# EAGLE board Sequencer-Memory-V1.0-3 3 (EAGLE 7.6.0)
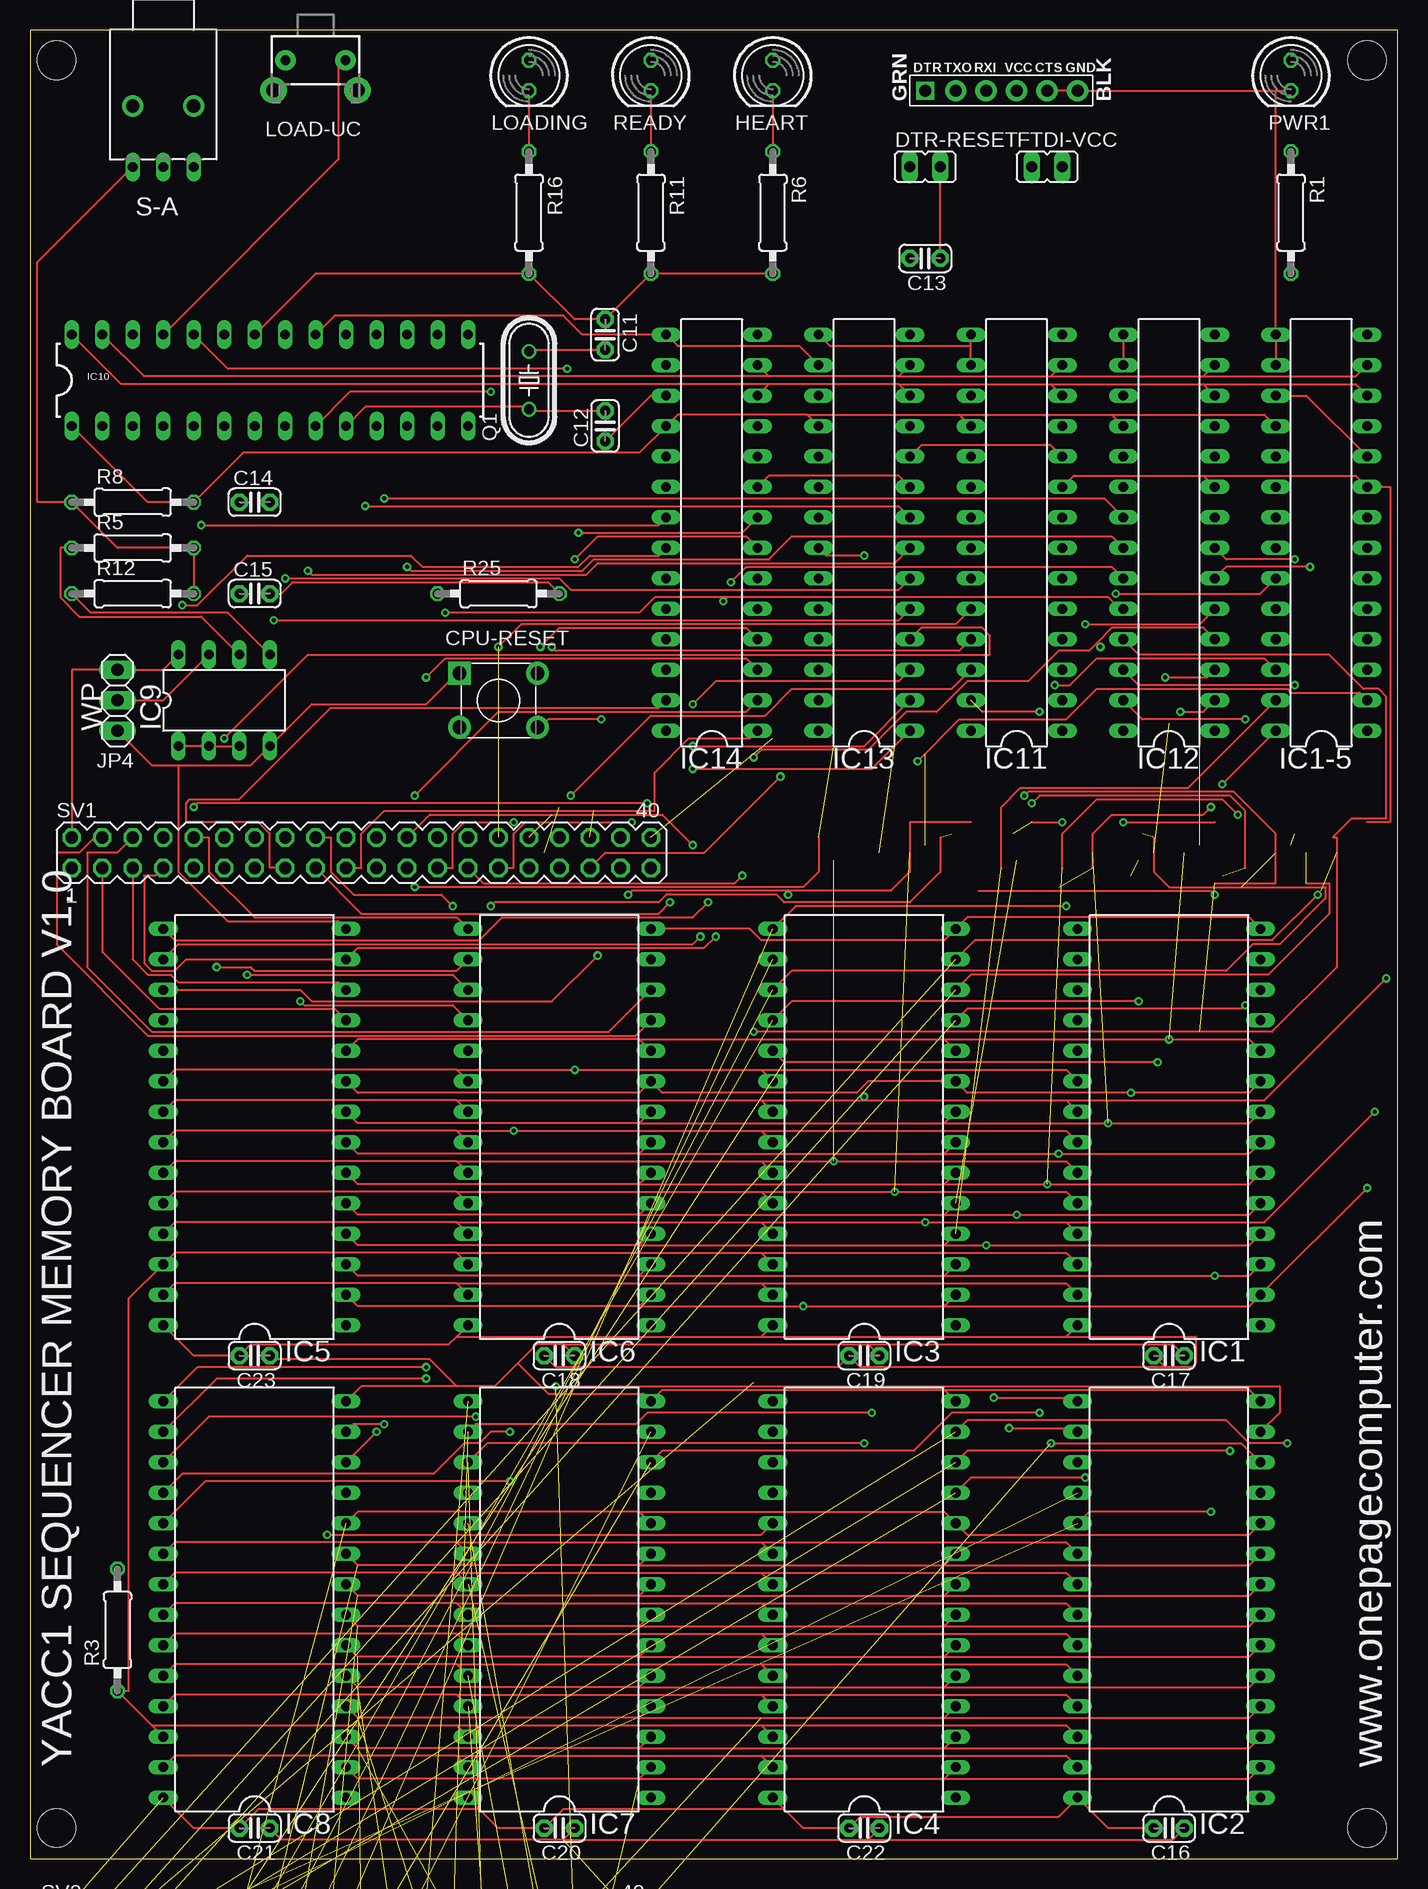
[diagram p0: board, top side]
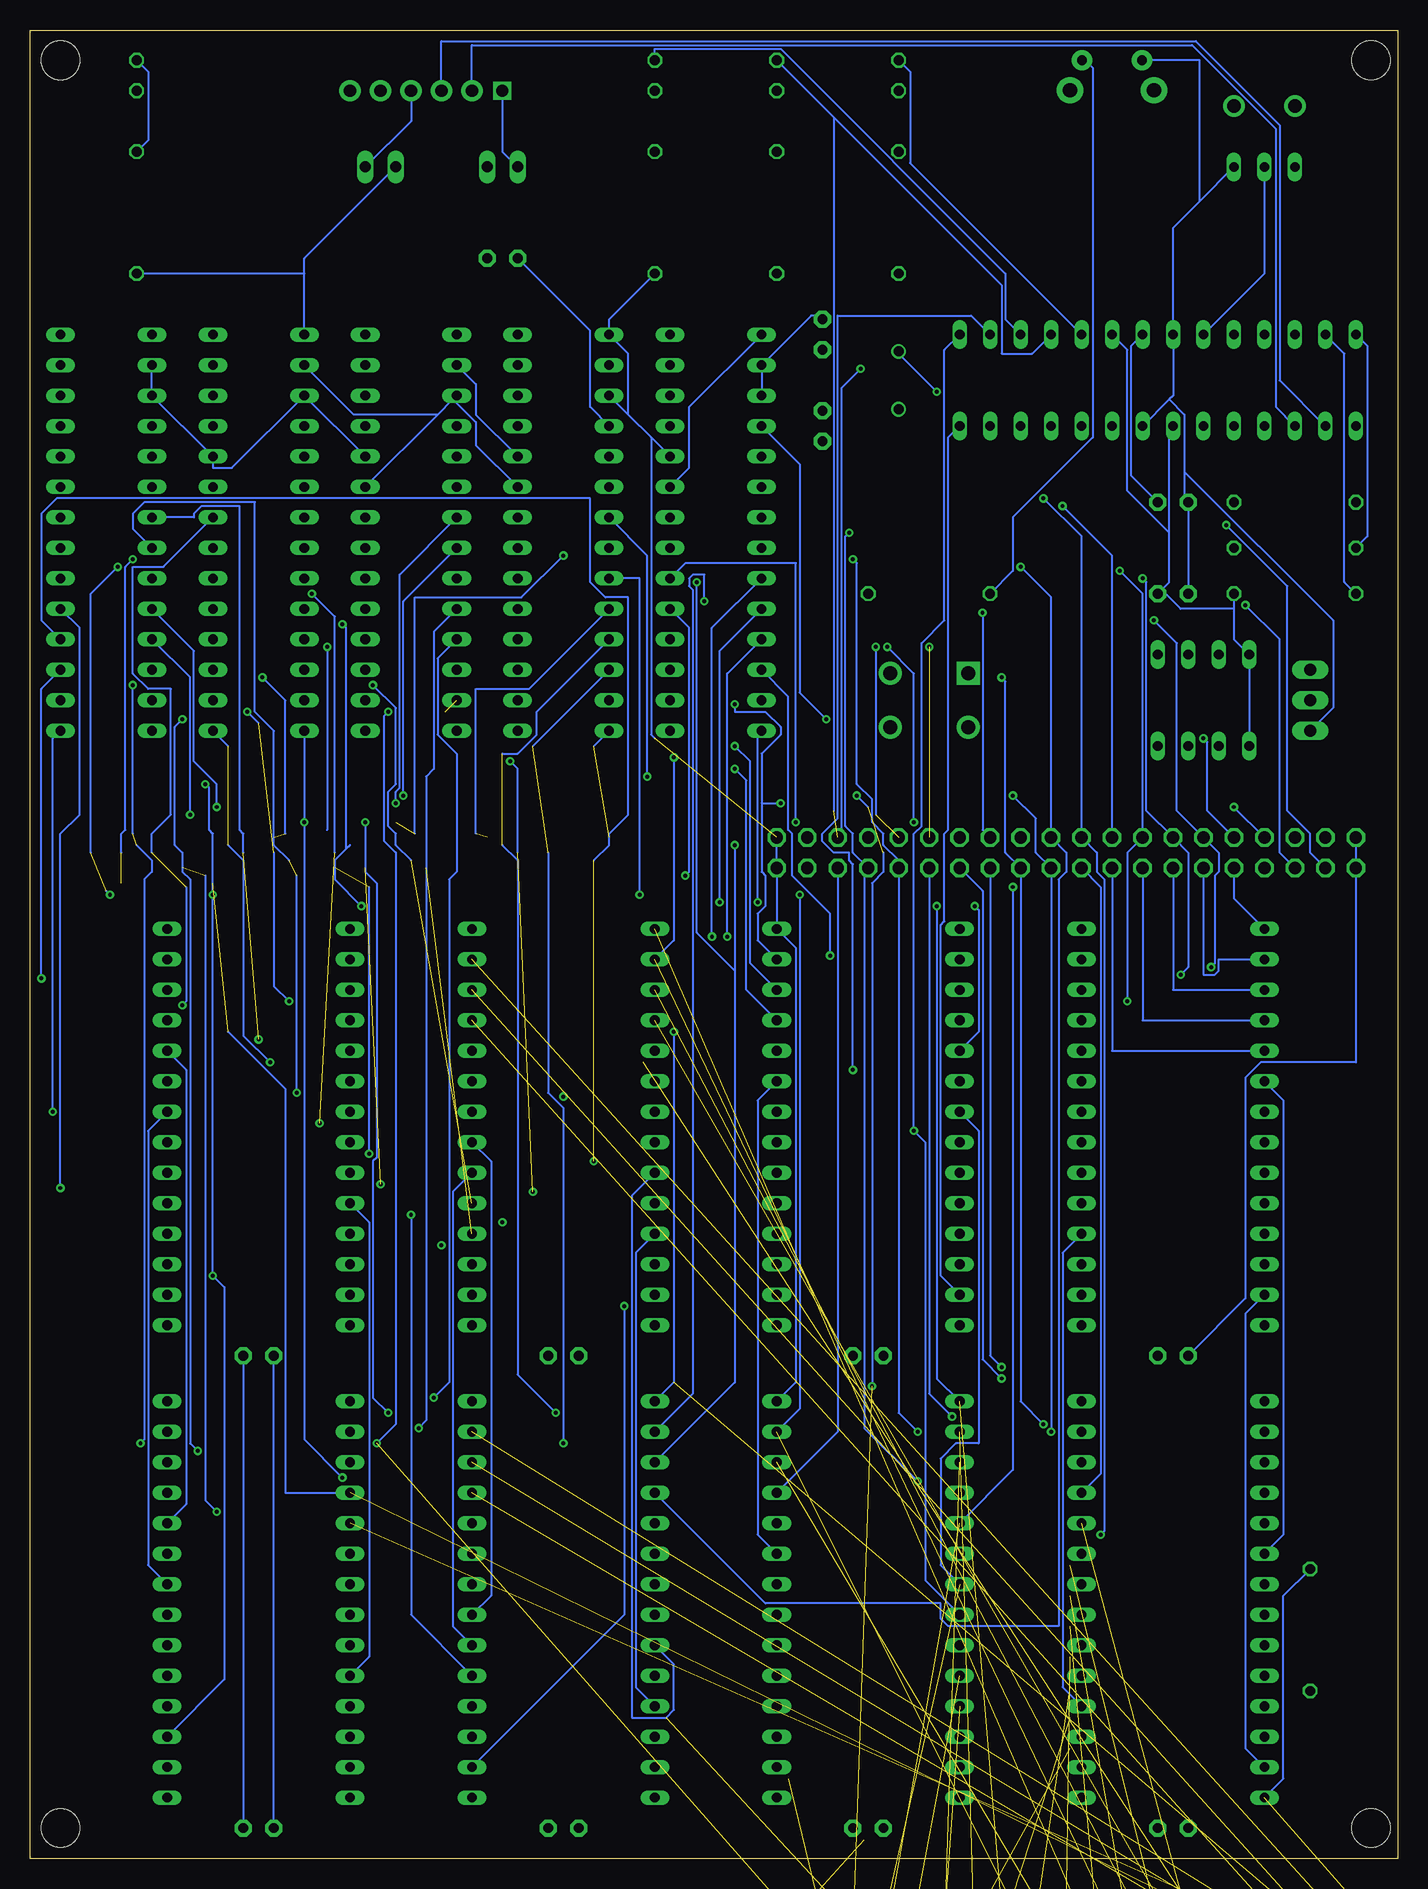
[diagram p1: board, bottom side, seen from below]

Size 113.97 x 152.38 mm. Coordinates in mm from the lower left corner, seen from the top.
Outline: 113.97,0 113.97,152.38 0,152.38 0,0 113.97,0
Copper layers (1*16): Top 0.0356mm / dielectric 1.5011mm / Bottom 0.0356mm
Design rules "LaenPCBOrder *": minimum track width 6mil, minimum drill 13mil, track to track 6mil, track to pad 6mil, pad to pad 6mil, via to via 6mil, smd to smd 6mil, copper to edge 15mil, drill to drill 6mil, minimum pad ring 7mil, minimum via ring 7mil, stop-mask expansion 3mil, vias tented up to drill 0mil, thermal gap 10mil
Holes 3.2 mm at 111.43,2.54 111.43,149.86 2.21,149.86 2.21,2.54

## Footprints (pad centres in the part's own frame; a part is rotated, then mirrored left to right if it is on the bottom)
C025-024X044 = drill 0.813 pad 1.422 octagon: 1 -1.27,0; 2 1.27,0
SW4-6.2X6.2X5.0MM = drill 1.143 pad 1.905 square: 1 -3.25,2.25 | drill 1.143 pad 1.905: 2 -3.25,-2.25; 3 3.25,-2.25; 4 3.25,2.25
JP1 = drill 0.914 long: 1 0,-1.27; 2 0,1.27
LED5MM = drill 0.813 octagon: A -1.27,0; K 1.27,0
DIL28-6 = drill 0.813 long: 1 -16.51,-7.62; 2 -13.97,-7.62; 3 -11.43,-7.62; 4 -8.89,-7.62; 5 -6.35,-7.62; 6 -3.81,-7.62; 7 -1.27,-7.62; 8 1.27,-7.62; 9 3.81,-7.62; 10 6.35,-7.62; 11 8.89,-7.62; 12 11.43,-7.62; 13 13.97,-7.62; 14 16.51,-7.62; 15 16.51,7.62; 16 13.97,7.62; 17 11.43,7.62; 18 8.89,7.62; 19 6.35,7.62; 20 3.81,7.62; 21 1.27,7.62; 22 -1.27,7.62; 23 -3.81,7.62; 24 -6.35,7.62; 25 -8.89,7.62; 26 -11.43,7.62; 27 -13.97,7.62; 28 -16.51,7.62
DIL28-3 = drill 0.813 long: 1 -16.51,-3.81; 2 -13.97,-3.81; 3 -11.43,-3.81; 4 -8.89,-3.81; 5 -6.35,-3.81; 6 -3.81,-3.81; 7 -1.27,-3.81; 8 1.27,-3.81; 9 3.81,-3.81; 10 6.35,-3.81; 11 8.89,-3.81; 12 11.43,-3.81; 13 13.97,-3.81; 14 16.51,-3.81; 15 16.51,3.81; 16 13.97,3.81; 17 11.43,3.81; 18 8.89,3.81; 19 6.35,3.81; 20 3.81,3.81; 21 1.27,3.81; 22 -1.27,3.81; 23 -3.81,3.81; 24 -6.35,3.81; 25 -8.89,3.81; 26 -11.43,3.81; 27 -13.97,3.81; 28 -16.51,3.81
DIL8 = drill 0.813 long: 1 -3.81,-3.81; 2 -1.27,-3.81; 3 1.27,-3.81; 4 3.81,-3.81; 5 3.81,3.81; 6 1.27,3.81; 7 -1.27,3.81; 8 -3.81,3.81
FTDI_DEVICE_SIDE = drill 1 square: P$1 -6.35,0 | drill 1.016 pad 1.778: P$2 -3.81,0; P$3 -1.27,0; P$4 1.27,0; P$5 3.81,0; P$6 6.35,0
1X03 = drill 1.016 long: 1 -2.54,0; 2 0,0; 3 2.54,0
TACTILE-PTH-SIDEEZ = drill 0.8 pad 1.7: 1 -2.5,0; 2 2.5,0 | drill 1.2 pad 2.2: ANCHOR1 -3.5,2.5; ANCHOR2 3.5,2.5
HC49/S = drill 0.813: 1 -2.413,0; 2 2.413,0
0207/10 = drill 0.813 octagon: 1 -5.08,0; 2 5.08,0
9070-1W = drill 0.813 long: 1 5.08,-2.54; 2 5.08,0; 3 5.08,2.54 | drill 1.118 pad 1.778: B 0,-2.54; B1 0,2.54
MA20-2 = drill 1.016 octagon: 1 -24.13,-1.27; 2 -24.13,1.27; 3 -21.59,-1.27; 4 -21.59,1.27; 5 -19.05,-1.27; 6 -19.05,1.27; 7 -16.51,-1.27; 8 -16.51,1.27; 9 -13.97,-1.27; 10 -13.97,1.27; 11 -11.43,-1.27; 12 -11.43,1.27; 13 -8.89,-1.27; 14 -8.89,1.27; 15 -6.35,-1.27; 16 -6.35,1.27; 17 -3.81,-1.27; 18 -3.81,1.27; 19 -1.27,-1.27; 20 -1.27,1.27; 21 1.27,-1.27; 22 1.27,1.27; 23 3.81,-1.27; 24 3.81,1.27; 25 6.35,-1.27; 26 6.35,1.27; 27 8.89,-1.27; 28 8.89,1.27; 29 11.43,-1.27; 30 11.43,1.27; 31 13.97,-1.27; 32 13.97,1.27; 33 16.51,-1.27; 34 16.51,1.27; 35 19.05,-1.27; 36 19.05,1.27; 37 21.59,-1.27; 38 21.59,1.27; 39 24.13,-1.27; 40 24.13,1.27

## Placement (x,y rotation side)
C11  20pf  [C025-024X044]  47.93,127 270 top
C12  20pf  [C025-024X044]  47.93,119.38 90 top
C13  0.1  [C025-024X044]  74.6,133.35 180 top
C14  0.1  [C025-024X044]  18.72,113.03 0 top
C15  0.1  [C025-024X044]  18.72,105.41 0 top
C16  0.1  [C025-024X044]  94.92,2.54 180 top
C17  0.1  [C025-024X044]  94.92,41.91 180 top
C18  0.1  [C025-024X044]  44.12,41.91 180 top
C19  0.1  [C025-024X044]  69.52,41.91 180 top
C20  0.1  [C025-024X044]  44.12,2.54 180 top
C21  0.1  [C025-024X044]  18.72,2.54 180 top
C22  0.1  [C025-024X044]  69.52,2.54 180 top
C23  0.1  [C025-024X044]  18.72,41.91 180 top
CPU-RESET  TS-1109-7  [SW4-6.2X6.2X5.0MM]  39.04,96.52 0 top
DTR-RESET  [JP1]  74.6,140.97 270 top
FTDI-VCC  [JP1]  84.76,140.97 270 top
HEART  [LED5MM]  61.9,148.59 270 top
IC1  [DIL28-6]  94.92,60.96 90 top
IC1-5  MCP23017SP  [DIL28-3]  107.62,110.49 90 top
IC2  [DIL28-6]  94.92,21.59 90 top
IC3  [DIL28-6]  69.52,60.96 90 top
IC4  [DIL28-6]  69.52,21.59 90 top
IC5  [DIL28-6]  18.72,60.96 90 top
IC6  [DIL28-6]  44.12,60.96 90 top
IC7  [DIL28-6]  44.12,21.59 90 top
IC8  [DIL28-6]  18.72,21.59 90 top
IC9  24AA01P  [DIL8]  16.18,96.52 0 top
IC10  ATMEGA328P_PDIP  [DIL28-3]  19.99,123.19 0 top
IC11  MCP23017SP  [DIL28-3]  82.22,110.49 90 top
IC12  MCP23017SP  [DIL28-3]  94.92,110.49 90 top
IC13  MCP23017SP  [DIL28-3]  69.52,110.49 90 top
IC14  MCP23017SP  [DIL28-3]  56.82,110.49 90 top
JP3  FTDI_DEVICE  [FTDI_DEVICE_SIDE]  80.95,147.32 0 top
JP4  [1X03]  7.29,96.52 90 top
LOAD-UC  SWITCH-MOMENTARY-2SIDE_EZ  [TACTILE-PTH-SIDEEZ]  23.8,149.86 180 top
LOADING  [LED5MM]  41.58,148.59 270 top
PWR1  [LED5MM]  105.08,148.59 270 top
Q1  16Mhz  [HC49/S]  41.58,123.19 90 top
R1  330  [0207/10]  105.08,137.16 270 top
R3  10k  [0207/10]  7.29,19.05 90 top
R5  2.2k  [0207/10]  8.56,109.22 0 top
R6  330  [0207/10]  61.9,137.16 270 top
R8  10k  [0207/10]  8.56,113.03 0 top
R11  330  [0207/10]  51.74,137.16 270 top
R12  2.2k  [0207/10]  8.56,105.41 0 top
R16  330  [0207/10]  41.58,137.16 270 top
R25  10k  [0207/10]  39.04,105.41 0 top
READY  [LED5MM]  51.74,148.59 270 top
S-A  [9070-1W]  11.1,146.05 270 top
SV1  [MA20-2]  27.61,83.82 0 top
SV2  [MA20-2]  26.34,-6.35 0 top  (outside the outline)

## Library data of the parts
C11-C23 = adafruit
CPU-RESET = Seeed-OPL-Switch; MPN: TS-1109-7
DTR-RESET FTDI-VCC = jumper
HEART LOADING PWR1 READY = led
IC1-IC8 = memory-hitachi; OC_FARNELL: 283605; OC_NEWARK: unknown
IC1-5 IC11-IC14 = microchip; MF: MICROCHIP; MPN: MCP23017-E/SP; OC_FARNELL: 1332088; OC_NEWARK: 31K2959
IC9 = microchip; MPN: 24AA01-I/P; OC_FARNELL: 1331266; OC_NEWARK: 35M0692
IC10 = SparkFun-DigitalIC
JP3 = SparkFun-Connectors
JP4 = pinhead
LOAD-UC = SparkFun-Electromechanical
Q1 = crystal; OC_FARNELL: 1667008; OC_NEWARK: unknown
R1 = eagle-ltspice; SPICEMODEL: NONE; SPICEPREFIX: R
R3 R5 R6 R8 R11 R12 R16 R25 = resistor
S-A = switch
SV1 SV2 = con-lstb; OC_FARNELL: unknown; OC_NEWARK: unknown

## Nets
-CMEMRD: IC1.22 IC2.22 IC3.22 IC4.22 IC5.22 IC6.22 IC7.22 IC8.22 IC10.15
-CMEMSEL: IC1.20 IC2.20 IC3.20 IC4.20 IC5.20 IC6.20 IC7.20 IC8.20 IC10.16
-CMEMWR: IC1.27 IC2.27 IC3.27 IC4.27 IC5.27 IC6.27 IC7.27 IC8.27 IC10.14
-RESET: C13.2 CPU-RESET.3 IC1-5.18 IC10.1 IC11.18 IC12.18 IC13.18 IC14.18 R8.2
AC-LD: IC3.17 IC12.3 SV2.15
AC-LD-INV: IC3.18 IC12.2 SV2.13
AC-RD: IC3.16 IC12.4 SV2.17
ADDR-REG-ID0: IC5.12 IC14.22 SV1.5
ADDR-REG-ID1: IC5.13 IC14.23 SV1.7
ADDR-REG-LD: IC5.15 IC14.24 SV1.9
ADDR-REG-RD: IC5.16 IC14.25 SV1.11
ALU0: IC4.13 IC12.26 SV2.5
ALU1: IC4.12 IC12.27 SV2.7
ALU2: IC4.11 IC12.28 SV2.9
ALU3: IC3.19 IC12.1 SV2.11
ALU-FUNC: IC4.15 IC12.25 SV2.3
ARD-RXIN: IC10.2 JP3.P$3
ARD-TXOUT: IC10.3 JP3.P$2
BR-COND: IC3.13 IC12.6 SV2.4
CADDR0: IC1-5.21 IC1.10 IC2.10 IC3.10 IC4.10 IC5.10 IC6.10 IC7.10 IC8.10 SV2.14
CADDR1: IC1-5.22 IC1.9 IC2.9 IC3.9 IC4.9 IC5.9 IC6.9 IC7.9 IC8.9 SV2.16
CADDR2: IC1-5.23 IC1.8 IC2.8 IC3.8 IC4.8 IC5.8 IC6.8 IC7.8 IC8.8 SV2.18
CADDR3: IC1-5.24 IC1.7 IC2.7 IC3.7 IC4.7 IC5.7 IC6.7 IC7.7 IC8.7 SV2.20
CADDR4: IC1-5.25 IC1.6 IC2.6 IC3.6 IC4.6 IC5.6 IC6.6 IC7.6 IC8.6 SV2.22
CADDR5: IC1-5.26 IC1.5 IC2.5 IC3.5 IC4.5 IC5.5 IC6.5 IC7.5 IC8.5 SV2.24
CADDR6: IC1-5.27 IC1.4 IC2.4 IC3.4 IC4.4 IC5.4 IC6.4 IC7.4 IC8.4 SV2.26
CADDR7: IC1-5.28 IC1.3 IC2.3 IC3.3 IC4.3 IC5.3 IC6.3 IC7.3 IC8.3 SV2.28
CADDR8: IC1-5.1 IC1.25 IC2.25 IC3.25 IC4.25 IC5.25 IC6.25 IC7.25 IC8.25 SV2.30
CADDR9: IC1-5.2 IC1.24 IC2.24 IC3.24 IC4.24 IC5.24 IC6.24 IC7.24 IC8.24 SV2.32
CADDR10: IC1-5.3 IC1.21 IC2.21 IC3.21 IC4.21 IC5.21 IC6.21 IC7.21 IC8.21 SV2.34
CADDR11: IC1-5.4 IC1.23 IC2.23 IC3.23 IC4.23 IC5.23 IC6.23 IC7.23 IC8.23 SV2.36
CADDR12: IC1-5.5 IC1.2 IC2.2 IC3.2 IC4.2 IC5.2 IC6.2 IC7.2 IC8.2 SV2.38
CMEMSEL: IC1.26 IC2.26 IC3.26 IC4.26 IC5.26 IC6.26 IC7.26 IC8.26 R3.1
GND: C11.1 C12.1 C14.1 C15.1 C16.1 C17.1 C18.1 C19.1 C20.1 C21.1 C22.1 C23.1 CPU-RESET.1 IC1-5.10 IC1-5.15 IC1-5.16 IC1-5.17 IC1.14 IC2.14 IC3.14 IC4.14 IC5.14 IC6.14 IC7.14 IC8.14 IC9.4 IC10.8 IC10.22 IC11.10 IC11.15 IC11.16 IC12.10 IC12.17 IC13.10 IC13.15 IC13.17 IC14.10 IC14.16 IC14.17 JP3.P$5 JP3.P$6 JP4.1 LOAD-UC.2 PWR1.K R6.2 R11.2 R16.2 S-A.3 SV1.39 SV1.40 SV2.39 SV2.40
H/L-SWAP: IC3.12 IC12.7 SV2.6
HEART: HEART.A IC10.17
I/D-REG-DN: IC6.13 IC13.3 SV1.8
I/D-REG-LD: IC6.11 IC13.1 SV1.4
I/D-REG-RD: IC6.12 IC13.2 SV1.6
I/D-REG-UP: IC6.15 IC13.4 SV1.10
I/O-ADDR: IC7.17 IC13.26 SV2.29
I/O-RD: IC7.16 IC13.25 SV2.27
I/O-WR: IC7.15 IC13.24 SV2.25
INT-EN: IC2.15 IC11.25 SV1.32
INT-START: IC2.16 IC11.24 SV1.30
INTA: IC7.19 IC13.28 SV2.33
LD: IC10.19 LOADING.A
LD-INS-REG: IC2.13 IC11.26 SV2.35
MEM-RD: IC7.13 IC13.23 SV2.23
MEM-WR: IC7.12 IC13.22 SV2.21
N$1: PWR1.A R1.1
N$6: C11.2 IC10.9 Q1.2
N$7: C12.2 IC10.10 Q1.1
N$8: C13.1 DTR-RESET.2
N$17: C14.2 IC10.21
N$25: R11.1 READY.K
N$26: LOADING.K R16.1
N$27: HEART.K R6.1
N$30: IC10.23 S-A.2
N$32: IC9.7 JP4.2
N$33: DTR-RESET.1 JP3.P$1
N$34: FTDI-VCC.2 JP3.P$4
N$39: IC10.25 LOAD-UC.1 R25.1
OUT-OFF: IC2.19 IC11.21 SV2.10
OUT-ON: IC3.11 IC12.8 SV2.8
READY: IC10.18 READY.A SV1.36
READY1: IC10.24
REG-BRD-LD-ID0: IC8.12 IC14.2 SV1.21
REG-BRD-LD-ID1: IC8.13 IC14.3 SV1.23
REG-BRD-RD-ID0: IC5.17 IC14.26 SV1.13
REG-BRD-RD-ID1: IC5.18 IC14.27 SV1.15
REG-FUNC: IC5.11 IC14.21 SV1.3
REG-LD-HI: IC7.11 IC13.21 SV1.35
REG-LD-ID0: IC8.15 IC14.4 SV1.25
REG-LD-ID1: IC8.16 IC14.5 SV1.27
REG-LD-LO: IC8.18 IC14.7 SV1.31
REG-RD-HI: IC8.19 IC14.8 SV1.33
REG-RD-ID0: IC5.19 IC14.28 SV1.17
REG-RD-ID1: IC8.11 IC14.1 SV1.19
REG-RD-LO: IC8.17 IC14.6 SV1.29
RESET: IC2.18 IC11.22 SV2.12
SCL: IC1-5.12 IC9.6 IC10.28 IC11.12 IC12.12 IC13.12 IC14.12 R5.1
SDA: IC1-5.13 IC9.5 IC10.27 IC11.13 IC12.13 IC13.13 IC14.13 R12.1
SP/PC-ADDR-RD: IC6.19 IC13.8 SV1.18
SP/PC-DATA-RD-HI: IC6.18 IC13.7 SV1.16
SP/PC-DATA-RD-LO: IC6.17 IC13.6 SV1.14
SP/PC-DN: IC4.17 IC12.23 SV1.24
SP/PC-LD-HI: IC4.18 IC12.22 SV1.22
SP/PC-LD-LO: IC4.19 IC12.21 SV1.20
SP/PC-SEL: IC6.16 IC13.5 SV1.12
SP/PC-UP: IC4.16 IC12.24 SV1.26
SR-LD: IC3.15 IC12.5 SV2.19
UCODE-COUNT-RESET: IC2.12 IC11.27 SV2.37
VCC: C15.2 C16.2 C17.2 C18.2 C19.2 C20.2 C21.2 C22.2 C23.2 FTDI-VCC.1 IC1-5.9 IC1.28 IC2.28 IC3.28 IC4.28 IC5.28 IC6.28 IC7.28 IC8.28 IC9.1 IC9.2 IC9.3 IC9.8 IC10.7 IC10.20 IC11.9 IC11.17 IC12.9 IC12.15 IC12.16 IC13.9 IC13.16 IC14.9 IC14.15 JP4.3 R1.2 R3.2 R5.2 R8.1 R12.2 R25.2 S-A.1 SV1.1 SV1.2 SV2.1 SV2.2

## Tracks (layer width: path | path; a pad name or v marks a point on that pad's centre or on a via)
-CMEMRD  (via drill 0.33)
  Top 0.152: IC8.22 12.05,21.27 35.55,21.27 | IC7.22 35.55,21.27 | 60.95,21.27 IC4.22 | 35.55,21.27 60.95,21.27 | IC2.22 86.35,21.27 60.95,21.27 | IC5.22 12.05,60.64 35.55,60.64 | IC6.22 35.55,60.64 | 60.95,60.64 IC3.22 | 35.55,60.64 v40.31,60.64 60.95,60.64 | IC1.22 86.35,60.64 60.95,60.64
  Bottom 0.152: IC10.15 37.77,125.73 37.77,103.19 39.68,101.28 39.68,86.04 40.31,85.41 v40.31,60.64 39.36,59.69 39.36,23.18 IC7.22
-CMEMSEL  (via drill 0.33)
  Top 0.152: IC8.20 12.05,26.35 35.55,26.35 | IC7.20 35.55,26.35 | 60.95,26.35 IC4.20 | 35.55,26.35 60.95,26.35 | IC2.20 86.35,26.35 60.95,26.35 | IC5.20 12.05,65.72 35.55,65.72 | IC6.20 35.55,65.72 | 60.95,65.72 IC3.20 | 35.55,65.72 v45.39,65.72 60.95,65.72 | IC1.20 86.35,65.72 60.95,65.72
  Bottom 0.152: IC10.16 35.55,128.59 46.66,128.59 46.66,86.68 47.93,85.41 47.93,84.77 46.98,83.82 45.71,83.82 45.71,83.19 45.39,82.87 v45.39,65.72 | IC8.20 9.51,26.99 9.51,63.18 IC5.20
-CMEMWR
  Top 0.152: IC8.27 12.05,8.57 35.55,8.57 | IC7.27 35.55,8.57 | 60.95,8.57 IC4.27 | 35.55,8.57 60.95,8.57 | IC2.27 86.35,8.57 60.95,8.57 | IC5.27 12.05,47.94 35.55,47.94 | IC6.27 35.55,47.94 | 60.95,47.94 IC3.27 | 35.55,47.94 60.95,47.94 | IC1.27 86.35,47.94 60.95,47.94
  Bottom 0.152: IC10.14 37.45,118.43 37.45,85.72 37.77,85.41 37.77,78.11 38.09,77.79 38.09,48.58 IC6.27 | IC8.27 12.69,9.21 12.69,45.4 IC5.27
-RESET  (via drill 0.33)
  Top 0.152: IC10.1 9.83,113.03 R8.2 17.77,117.16 50.79,117.16 IC14.18 53.96,120.33 64.76,120.33 | IC13.18 64.76,120.33 | 77.46,120.33 IC11.18 | 64.76,120.33 77.46,120.33 | 90.16,120.33 IC12.18 | 77.46,120.33 90.16,120.33 | IC1-5.18 102.86,120.33 90.16,120.33 | v47.61,94.93 43.17,94.93 42.53,94.3 CPU-RESET.3
  Bottom 0.152: C13.2 67.3,127.32 67.3,120.97 IC13.18 | v47.61,94.93 49.84,97.16 49.84,116.2 IC14.18
AC-LD  (via drill 0.33)  (2 unrouted)
  Top 0.152: IC3.17 63.49,73.98 99.68,73.98 101.91,76.2 104.13,76.2 107.94,80.01 107.94,80.96 94.92,80.96 93.65,82.23 93.65,85.09 | IC12.3 98.09,98.42 v94.6,98.42
  Bottom 0.152: v94.6,98.42 92.7,96.52 92.7,85.41
AC-LD-INV  (via drill 0.33)  (2 unrouted)
  Top 0.152: IC3.18 63.49,71.44 v92.38,71.44 | IC12.2 97.78,95.57 v95.87,95.57
  Bottom 0.152: v92.38,71.44 93.65,72.71 93.65,83.82 | 94.92,94.61 v95.87,95.57
AC-RD  (via drill 0.33)  (1 unrouted)
  Top 0.152: v60.31,91.76 60.95,92.39 69.84,92.39 73.01,95.57 75.55,95.57 78.09,98.11 83.17,98.11 85.71,100.65 88.25,100.65 88.89,101.28 | 88.89,101.28 90.16,102.55 97.78,102.55 IC12.4 | 88.89,101.28 v89.2,100.97
  Bottom 0.152: IC3.16 60.31,76.52 v60.31,91.76 | v89.2,100.97 89.2,85.72
ADDR-REG-ID0  (via drill 0.33)
  Top 0.152: IC5.12 25.71,73.03 12.37,73.03 11.73,73.66 9.83,73.66 8.56,74.93 SV1.5 | IC14.22 52.38,108.58 46.66,108.58 45.71,107.63 32.69,107.63 31.74,108.58 18.09,108.58 13.96,104.46 v12.69,104.46
  Bottom 0.152: v12.69,104.46 9.83,101.6 9.83,83.82 SV1.5
ADDR-REG-ID1  (via drill 0.33)
  Top 0.152: SV1.7 10.46,81.92 9.51,81.92 9.51,74.61 10.15,73.98 12.05,73.98 13.01,74.93 IC5.13 27.29,75.88 56.19,75.88 v57.14,76.83
  Bottom 0.152: IC14.23 57.14,102.55 v57.14,76.83
ADDR-REG-LD  (via drill 0.33)
  Top 0.152: v56.5,79.69 55.23,78.42 39.36,78.42 37.45,76.52 12.05,76.52 IC5.15
  Bottom 0.152: IC5.15 13.64,80.01 SV1.9 | IC14.24 56.5,100.65 v56.5,79.69
ADDR-REG-RD  (via drill 0.33)
  Top 0.152: v55.87,76.83 55.23,76.2 12.37,76.2 IC5.16
  Bottom 0.152: IC5.16 14.91,74.93 14.91,73.98 15.23,73.66 16.18,73.66 SV1.11 | IC14.25 55.87,98.74 v55.87,76.83
ALU0  (via drill 0.33)  (2 unrouted)
  Top 0.152: IC4.13 78.09,36.51 99.68,36.51 101.59,34.61 v104.76,34.61 | IC12.26 92.38,97.79 v105.4,97.79
  Bottom 0.152: v104.76,34.61 104.45,34.92 104.45,81.6 103.81,82.23 103.81,83.19 105.08,84.45 | 105.4,85.41 v105.4,97.79
ALU1  (via drill 0.33)  (1 unrouted)
  Top 0.152: IC4.12 78.09,33.97 v100,33.97 | IC12.27 92.7,94.93 v101.27,94.93
  Bottom 0.152: v100,33.97 100.64,34.61 100.64,81.6 101.27,82.23 101.27,83.82 101.91,84.45 101.91,94.3 v101.27,94.93
ALU2  (via drill 0.33)  (1 unrouted)
  Top 0.152: IC4.11 78.41,31.75 v87.94,31.75 | v91.11,86.36 98.73,86.36
  Bottom 0.152: v87.94,31.75 91.11,34.92 v91.11,86.36 IC12.28
ALU3  (via drill 0.33)  (2 unrouted)
  Top 0.152: IC3.19 62.85,66.36 v93.97,66.36
  Bottom 0.152: v93.97,66.36 96.19,68.58 96.19,83.19 97.46,84.45 | 97.46,92.71 IC12.1
ALU-FUNC  (via drill 0.33)  (1 unrouted)
  Top 0.152: v60.31,68.9 103.49,68.9 108.89,74.3 108.89,85.09 108.57,85.09 110.16,86.68 113.02,86.68 113.02,96.84 112.38,97.47 111.11,97.47 108.25,100.33 92.38,100.33 IC12.25
  Bottom 0.152: IC4.15 60.31,39.69 v60.31,68.9
ARD-RXIN
  Bottom 0.152: IC10.2 9.83,123.19 9.83,144.46 16.82,151.45 79.68,151.45 JP3.P$3
ARD-TXOUT
  Bottom 0.152: IC10.3 10.15,120.97 10.15,144.15 17.13,151.13 77.14,151.13 JP3.P$2
BR-COND  (via drill 0.33)  (2 unrouted)
  Top 0.152: IC3.13 78.73,76.52 103.49,76.52 v107.3,80.33 | IC12.6 99.68,107.63 v106.67,107.63
  Bottom 0.152: 107.62,80.64 v107.3,80.33 | v106.67,107.63 108.89,105.41 108.89,83.82
CADDR0  (via drill 0.33)  (2 unrouted)
  Top 0.152: IC8.10 27.29,28.89 50.79,28.89 | IC7.10 50.79,28.89 | 50.79,28.89 76.19,28.89 IC4.10 78.09,26.99 101.59,26.99 IC2.10 | IC5.10 27.29,68.26 50.79,68.26 | IC6.10 50.79,68.26 | 76.19,68.26 IC3.10 | 50.79,68.26 76.19,68.26 | IC1.10 101.59,68.26 v94.92,68.26 76.19,68.26
  Bottom 0.152: IC1-5.21 100.32,111.76 100.32,112.08 99.68,112.71 96.51,112.71 96.51,85.72 96.19,85.41 96.19,83.82 | IC2.10 100.95,29.53 100.95,65.72 IC1.10
CADDR1  (via drill 0.33)  (2 unrouted)
  Top 0.152: IC8.9 27.29,24.45 50.79,24.45 | IC7.9 50.79,24.45 | 76.19,24.45 IC4.9 | 50.79,24.45 76.19,24.45 | IC2.9 101.59,24.45 76.19,24.45 | IC5.9 27.29,63.82 50.79,63.82 IC6.9 52.69,63.82 68.89,63.82 69.84,64.77 IC3.9 78.09,63.82 v91.75,63.82 101.59,63.82 IC1.9
  Bottom 0.152: IC1-5.22 105.4,110.81 105.4,112.08 104.45,113.03 95.24,113.03 95.24,95.57 93.65,93.98 93.65,84.45 92.38,83.19 | v91.75,63.82 91.75,81.92 | IC7.9 53.33,26.99 53.33,63.18 IC6.9
CADDR2  (via drill 0.33)  (2 unrouted)
  Top 0.152: IC8.8 27.29,21.91 50.79,21.91 | IC7.8 50.79,21.91 | 76.19,21.91 IC4.8 | 50.79,21.91 76.19,21.91 | IC2.8 101.59,21.91 76.19,21.91 | IC1-5.23 102.54,105.41 v90.48,105.41 | IC5.8 27.29,61.28 50.79,61.28 | IC6.8 50.79,61.28 | 76.19,61.28 IC3.8 | 50.79,61.28 76.19,61.28 | IC1.8 101.59,61.28 v89.84,61.28 76.19,61.28
  Bottom 0.152: v90.48,105.41 88.57,103.5 88.57,83.82 | IC2.8 104.13,24.45 104.13,60.64 IC1.8
CADDR3  (via drill 0.33)  (2 unrouted)
  Top 0.152: IC8.7 27.29,19.37 50.79,19.37 | IC7.7 50.79,19.37 | 76.19,19.37 IC4.7 | 50.79,19.37 76.19,19.37 | IC2.7 101.59,19.37 76.19,19.37 | v98.41,87.63 97.78,87 90.16,87 88.57,85.41 88.57,82.55 | IC5.7 27.29,58.74 50.79,58.74 | IC6.7 50.79,58.74 | 76.19,58.74 IC3.7 | 50.79,58.74 76.19,58.74 | IC1.7 101.59,58.74 v85.71,58.74 76.19,58.74
  Bottom 0.152: IC1-5.24 100.32,100.65 100.32,91.44 98.41,89.53 v98.41,87.63 | v85.71,58.74 85.71,80.96 | IC4.7 75.55,21.91 75.55,58.1 IC3.7
CADDR4  (via drill 0.33)  (2 unrouted)
  Top 0.152: IC8.6 27.29,16.83 50.79,16.83 | IC7.6 50.79,16.83 | 76.19,16.83 IC4.6 | 50.79,16.83 76.19,16.83 | IC2.6 101.59,16.83 76.19,16.83 | v100.64,87 99.36,88.27 88.89,88.27 86.03,85.41 86.03,82.55 | IC5.6 27.29,56.2 50.79,56.2 | IC6.6 50.79,56.2 | 76.19,56.2 IC3.6 | 50.79,56.2 76.19,56.2 | IC1.6 101.59,56.2 v84.76,56.2 76.19,56.2
  Bottom 0.152: IC1-5.25 100.64,98.42 v100.64,87 | IC4.6 78.73,19.37 78.73,55.56 IC3.6
CADDR5  (via drill 0.33)  (2 unrouted)
  Top 0.152: IC8.5 27.29,14.29 50.79,14.29 | IC7.5 50.79,14.29 | 76.19,14.29 IC4.5 | 50.79,14.29 76.19,14.29 | IC2.5 101.59,14.29 76.19,14.29 | IC1-5.26 102.86,100.01 88.89,100.01 86.67,97.79 v85.39,97.79 | IC5.5 27.29,53.66 50.79,53.66 | IC6.5 50.79,53.66 | 76.19,53.66 IC3.5 | 50.79,53.66 76.19,53.66 | IC1.5 101.59,53.66 v82.22,53.66 76.19,53.66
  Bottom 0.152: v85.39,97.79 83.49,95.89 83.49,89.53 84.12,88.9 84.12,86.04 83.49,85.41 83.49,84.45 82.22,83.19 | IC4.5 82.22,20.32 v82.22,53.66
CADDR6  (via drill 0.33)  (2 unrouted)
  Top 0.152: IC8.4 27.29,11.75 50.79,11.75 | IC7.4 50.79,11.75 | 76.19,11.75 IC4.4 | 50.79,11.75 76.19,11.75 | IC2.4 101.59,11.75 76.19,11.75 | IC1-5.27 96.51,89.22 82.54,89.22 80.95,87.63 80.95,82.55 | IC5.4 27.29,51.12 50.79,51.12 | IC6.4 50.79,51.12 | 76.19,51.12 IC3.4 | 50.79,51.12 76.19,51.12 | IC1.4 101.59,51.12 v79.68,51.12 76.19,51.12
  Bottom 0.152: IC8.4 27.93,14.29 27.93,50.48 IC5.4
CADDR7  (via drill 0.33)  (1 unrouted)
  Top 0.152: IC8.3 27.29,9.21 50.79,9.21 | IC7.3 50.79,9.21 | 76.19,9.21 IC4.3 | 50.79,9.21 76.19,9.21 | IC2.3 101.59,9.21 76.19,9.21 | v99.36,89.53 IC1-5.28 | v98.73,80.33 98.41,80.64 79.05,80.64 | IC5.3 27.29,48.58 50.79,48.58 | IC6.3 50.79,48.58 | 76.19,48.58 IC3.3 | 50.79,48.58 76.19,48.58 | IC1.3 101.59,48.58 v98.73,48.58 76.19,48.58
  Bottom 0.152: v99.36,89.53 99.05,89.22 99.05,85.72 98.73,85.41 v98.73,80.33 v98.73,48.58 97.78,47.62 97.78,14.92 IC2.3
CADDR8  (via drill 0.33)  (1 unrouted)
  Top 0.152: IC8.25 12.05,13.65 35.55,13.65 | IC7.25 35.55,13.65 | 60.95,13.65 IC4.25 | 35.55,13.65 60.95,13.65 | IC2.25 86.35,13.65 60.95,13.65 | IC5.25 12.05,53.02 35.55,53.02 | IC6.25 35.55,53.02 | 60.95,53.02 IC3.25 | 35.55,53.02 60.95,53.02 | 86.35,53.02 IC1.25 | 60.95,53.02 v74.6,53.02 86.35,53.02 | v112.06,62.23 102.86,53.02 86.35,53.02
  Bottom 0.152: IC1-5.1 112.06,93.34 v112.06,62.23 | IC4.25 63.49,14.29 63.49,50.48 IC3.25
CADDR9  (via drill 0.33)  (2 unrouted)
  Top 0.152: IC8.24 12.05,16.19 35.55,16.19 | IC7.24 35.55,16.19 | 60.95,16.19 IC4.24 | 35.55,16.19 60.95,16.19 | IC2.24 86.35,16.19 60.95,16.19 | IC1-5.2 110.8,97.16 105.08,97.16 104.76,97.47 88.89,97.47 86.35,94.93 77.46,94.93 v73.97,91.44 | IC5.24 12.05,55.56 35.55,55.56 | IC6.24 35.55,55.56 | 60.95,55.56 IC3.24 | 35.55,55.56 60.95,55.56 | IC1.24 86.35,55.56 v72.06,55.56 60.95,55.56
  Bottom 0.152: v73.97,91.44 73.33,90.81 73.33,83.82 | IC2.24 85.71,16.83 85.71,53.02 IC1.24
CADDR10  (via drill 0.33)  (1 unrouted)
  Top 0.152: IC8.21 12.05,23.81 35.55,23.81 | IC7.21 35.55,23.81 | 60.95,23.81 IC4.21 | 35.55,23.81 60.95,23.81 | IC2.21 86.35,23.81 60.95,23.81 | IC5.21 12.05,63.18 35.55,63.18 | IC6.21 35.55,63.18 | 60.95,63.18 IC3.21 | 35.55,63.18 60.95,63.18 | 86.35,63.18 IC1.21 | 60.95,63.18 69.52,63.18 | 69.52,63.18 86.35,63.18 | v113.02,73.34 102.86,63.18 86.35,63.18 | 69.52,63.18 v69.52,63.5
  Bottom 0.152: IC1-5.3 113.02,97.47 v113.02,73.34 | IC7.21 38.09,24.45 38.09,33.34 36.82,34.61 34.91,34.61 34.91,60.64 IC6.21
CADDR11  (via drill 0.33)  (2 unrouted)
  Top 0.152: IC8.23 12.05,18.73 35.55,18.73 | IC7.23 35.55,18.73 | 60.95,18.73 IC4.23 | 35.55,18.73 60.95,18.73 | IC2.23 86.35,18.73 60.95,18.73 | IC5.23 12.05,58.1 35.55,58.1 | IC6.23 35.55,58.1 | 60.95,58.1 IC3.23 | 35.55,58.1 60.95,58.1 | IC1.23 86.35,58.1 v66.98,58.1 60.95,58.1
  Bottom 0.152: IC1-5.4 113.02,103.19 113.02,112.08 111.75,113.35 67.3,113.35 67.3,106.36 66.03,105.09 64.12,105.09 64.12,87 65.71,85.41 65.71,84.45 66.98,83.19 | IC4.23 60.31,16.19 60.31,12.38 60.95,11.75 63.81,11.75 63.81,55.24 IC3.23
CADDR12  (via drill 0.33)  (1 unrouted)
  Top 0.152: IC8.2 27.29,6.67 50.79,6.67 | IC7.2 50.79,6.67 | 76.19,6.67 IC4.2 | 50.79,6.67 76.19,6.67 | IC2.2 101.59,6.67 76.19,6.67 | IC5.2 27.29,46.04 50.79,46.04 | IC6.2 50.79,46.04 | 76.19,46.04 IC3.2 | 50.79,46.04 v64.44,46.04 76.19,46.04 | 76.19,46.04 101.59,46.04 IC1.2 v111.43,55.88
  Bottom 0.152: IC1-5.5 109.84,102.55 109.84,87 111.43,85.41 v111.43,55.88 | IC4.2 64.44,20.32 v64.44,46.04
CMEMSEL
  Top 0.152: 35.55,50.48 12.05,50.48 IC5.26 8.24,46.67 8.24,13.97 R3.1 10.15,11.11 | IC6.26 35.55,50.48 | 60.95,50.48 IC3.26 | 35.55,50.48 60.95,50.48 | IC1.26 86.35,50.48 60.95,50.48 | 10.15,11.11 IC8.26 | 35.55,11.11 IC7.26 | 10.15,11.11 35.55,11.11 | 60.95,11.11 IC4.26 | 35.55,11.11 60.95,11.11 | IC2.26 86.35,11.11 60.95,11.11
GND  (3 unrouted)
  Top 0.152: C21.1 20.94,1.59 44.44,1.59 | C20.1 44.44,1.59 | 69.84,1.59 C22.1 | 44.44,1.59 69.84,1.59 | C16.1 95.24,1.59 69.84,1.59 | IC8.14 27.61,39.37 35.55,39.37 | 35.55,39.37 38.72,39.37 40.63,41.27 | 40.63,41.27 42.22,42.86 44.44,42.86 | C18.1 44.44,42.86 | 40.63,41.27 43.17,38.73 51.11,38.73 IC7.14 52.69,39.05 76.19,39.05 | 76.19,39.05 IC4.14 | IC2.14 101.59,39.05 76.19,39.05 | C23.1 20.31,41.59 33.33,41.59 35.55,39.37 | 69.84,42.86 C19.1 | 44.44,42.86 69.84,42.86 | C17.1 95.24,42.86 69.84,42.86 | IC5.14 25.71,78.11 16.5,78.11 12.37,82.23 12.37,91.12 | 12.37,91.12 10.15,91.12 JP4.1 | 12.37,91.12 18.4,91.12 IC9.4 23.48,96.2 33.01,96.2 35.55,98.74 CPU-RESET.1 | IC1.14 101.59,78.42 78.09,78.42 IC3.14 76.19,76.52 60.95,76.52 60,77.47 IC6.14 | C12.1 51.74,121.92 IC14.17 | IC11.16 78.41,126.05 | 78.41,126.05 IC11.15 | 78.41,126.05 66.66,126.05 IC13.15 | R6.2 R11.2 C11.1 45.39,128.27 R16.2 23.8,132.08 IC10.22 | 103.81,147.32 JP3.P$6 JP3.P$5 | 103.81,147.32 PWR1.K | IC1-5.16 IC1-5.15 103.81,147.32 | IC1-5.10 106.35,121.92 IC1-5.17 | IC13.10 74.28,117.79 85.08,117.79 IC11.10
  Bottom 0.152: C17.1 C16.1 | C15.1 C14.1 17.77,113.35 17.77,115.57 | 19.04,121.6 18.72,121.92 IC10.22 18.72,135.89 16.5,138.11 | 19.04,121.6 IC10.8 | 16.5,138.11 S-A.3 | LOAD-UC.2 16.5,149.86 16.5,138.11 | 17.77,115.57 17.77,120.33 19.04,121.6 | JP4.1 5.38,95.89 5.38,103.19 17.77,115.57 | SV1.40 SV1.39 IC6.14 50.15,75.88 50.15,39.69 IC7.14 | IC14.17 IC14.16 48.88,128.59 47.93,128.59 C11.1 | IC13.10 76.82,120.33 76.82,122.87 IC11.16 | R6.2 65.71,128.27 IC13.15 64.12,125.41 64.12,120.33 | IC13.17 64.12,120.33 | 64.12,120.33 62.22,118.43 | 62.22,118.43 IC14.10 | IC11.10 IC12.17 97.14,115.89 98.73,115.89 IC12.10 IC1-5.17 IC1-5.16 | 61.9,93.34 62.22,93.66 62.22,118.43
H/L-SWAP  (via drill 0.33)  (2 unrouted)
  Top 0.152: IC3.12 78.41,73.66 103.17,73.66 108.25,78.74 108.25,81.28 106.35,81.28 | IC12.7 99.68,108.27 v105.4,108.27
  Bottom 0.152: v105.4,108.27 106.03,107.63 106.03,85.72 106.35,85.41 106.35,83.82
HEART
  Bottom 0.152: IC10.17 32.69,128.27 32.69,132.08 51.42,150.81 61.9,150.81 HEART.A
I/D-REG-DN  (via drill 0.33)
  Top 0.152: v55.23,96.2 57.14,98.11 72.38,98.11 IC13.3 | v13.64,87.63 13.96,87.95 v51.42,87.95
  Bottom 0.152: IC6.13 53.33,76.52 53.33,78.74 52.69,79.38 52.69,81.92 53.01,82.23 53.01,87.95 | 53.01,87.95 53.01,92.08 51.42,93.66 51.42,94.3 52.69,95.57 55.23,95.57 v55.23,96.2 | v13.64,87.63 SV1.8 | 53.01,87.95 v51.42,87.95
I/D-REG-LD  (via drill 0.33)
  Top 0.152: IC6.11 50.47,68.58 9.83,68.58 2.21,76.2 2.21,83.82 4.12,83.82 5.38,85.09 SV1.4 | IC13.1 70.16,90.81 v55.23,90.81
  Bottom 0.152: v55.23,90.81 54.28,89.85 54.28,72.39 IC6.11
I/D-REG-RD  (via drill 0.33)
  Top 0.152: IC6.12 48.25,68.9 10.15,68.9 4.75,74.3 4.75,83.82 7.29,83.82 SV1.6 | IC13.2 69.52,92.71 v55.23,92.71
  Bottom 0.152: v55.23,92.71 53.96,91.44 53.96,74.61 IC6.12
I/D-REG-UP  (via drill 0.33)
  Top 0.152: IC6.15 35.55,78.42 18.72,78.42 14.91,82.23 14.91,85.09 SV1.10 | IC13.4 74.28,102.55 79.36,102.55 80,101.92 80,100.33 23.17,100.33 v16.18,93.34
  Bottom 0.152: v16.18,93.34 15.86,93.03 15.86,87.31 SV1.10
I/O-ADDR  (via drill 0.33)  (2 unrouted)
  Top 0.152: IC7.17 38.09,34.61 v69.52,34.61
  Bottom 0.152: v69.52,34.61 69.52,62.55 70.79,63.82 70.79,83.82 | 72.06,92.71 IC13.26
I/O-RD  (via drill 0.33)  (2 unrouted)
  Top 0.152: IC7.16 37.14,36.2 50.47,36.2 51.42,37.15 v70.16,37.15
  Bottom 0.152: v70.16,37.15 73.33,40.32 73.33,83.19 74.6,84.45 | IC13.25 71.74,95.57 71.74,93.66 73.33,92.08 74.6,92.08
I/O-WR  (via drill 0.33)  (2 unrouted)
  Top 0.152: v38.41,79.38 38.72,79.69 52.38,79.69 53.01,80.33 62.22,80.33 62.85,79.69 73.33,79.69 75.87,82.23 75.87,85.09
  Bottom 0.152: IC7.15 38.41,40.01 v38.41,79.38 | IC13.24 72.38,97.47 76.82,97.47 76.82,85.41
INT-EN  (via drill 0.33)  (1 unrouted)
  Top 0.152: IC2.15 86.98,38.42 v80.31,38.42 | v43.48,100.97 43.8,100.65 77.46,100.65 IC11.25
  Bottom 0.152: v80.31,38.42 79.05,39.69 79.05,81.6 78.41,82.23 78.41,92.08 80,93.66 80,100.01 IC11.25 | v43.48,100.97 43.48,87
INT-START  (via drill 0.33)  (1 unrouted)
  Top 0.152: IC2.16 86.98,35.88 v81.59,35.88 | v39.04,100.97 40.95,102.87 77.14,102.87 IC11.24
  Bottom 0.152: v81.59,35.88 80.95,36.51 80.95,90.17 80.31,90.81 80.31,102.23 IC11.24
INTA  (via drill 0.33)  (2 unrouted)
  Top 0.152: v32.05,80.96 64.44,80.96 65.71,82.23 65.71,85.09
  Bottom 0.152: IC7.19 32.05,32.38 v32.05,80.96 | 66.98,92.71 IC13.28
LD
  Bottom 0.152: IC10.19 40.63,141.29 40.63,148.91 LOADING.A
LD-INS-REG  (via drill 0.33)  (2 unrouted)
  Top 0.152: IC2.13 104.13,37.15 104.13,39.37 v43.8,39.37 | IC11.26 76.82,97.47 63.49,97.47 61.27,95.25 51.74,95.25 v45.07,88.58
  Bottom 0.152: v43.8,39.37 43.8,81.28 42.85,82.23 42.85,83.82 | 44.12,87.63 v45.07,88.58
MEM-RD  (via drill 0.33)  (1 unrouted)
  Top 0.152: v49.84,80.33 50.15,80.64 63.17,80.64 | 63.17,80.64 71.74,80.64 73.33,82.23 73.33,86.36 78.41,86.36 | 63.17,80.64 v63.17,80.33
  Bottom 0.152: IC7.13 49.84,37.47 v49.84,80.33 | IC13.23 63.17,106.68 v63.17,80.33
MEM-WR  (via drill 0.33)  (2 unrouted)
  Top 0.152: IC7.12 52.69,33.97 73.65,33.97 76.82,37.15 v84.12,37.15 | 83.49,86.36 v86.03,86.36 | IC13.22 66.34,108.58 v69.52,108.58
  Bottom 0.152: v84.12,37.15 85.39,38.42 85.39,58.1 85.08,58.42 85.08,81.28 86.03,82.23 v86.03,86.36 | v69.52,108.58 73.01,105.09 81.9,105.09 81.9,85.41
N$1
  Bottom 0.152: R1.1 104.13,143.19 104.13,148.91 PWR1.A
N$6  (via drill 0.33)
  Top 0.152: IC10.9 26.66,122.24 v38.41,122.24 | C11.2 41.58,125.73 Q1.2
  Bottom 0.152: v38.41,122.24 41.58,125.41 Q1.2
N$7
  Top 0.152: IC10.10 27.93,120.97 41.58,120.97 Q1.1 41.58,120.65 C12.2
N$8
  Top 0.152: C13.1 DTR-RESET.2
N$17
  Bottom 0.152: IC10.21 22.21,126.05 22.21,115.25 C14.2
N$25
  Top 0.152: READY.K R11.1
N$26
  Top 0.152: LOADING.K R16.1
N$27
  Top 0.152: HEART.K R6.1
N$30
  Bottom 0.152: IC10.23 11.1,132.08 S-A.2
N$32
  Top 0.152: IC9.7 11.1,96.52 JP4.2
N$33
  Bottom 0.152: DTR-RESET.1 74.6,142.24 JP3.P$1
N$34
  Bottom 0.152: FTDI-VCC.2 82.22,144.78 JP3.P$4
N$39
  Top 0.152: IC10.25 25.71,141.6 25.71,149.86 LOAD-UC.1
  Bottom 0.152: R25.1 32.05,107.31 32.05,111.76 25.39,118.43 25.39,149.22 26.02,149.86 LOAD-UC.1
OUT-OFF  (via drill 0.33)  (2 unrouted)
  Top 0.152: v83.49,87.95 84.12,88.58 100,88.58 101.27,87.31 101.27,82.55 | IC2.19 88.25,28.89 v98.41,28.89
  Bottom 0.152: IC11.21 83.17,107 83.17,89.22 83.49,88.9 v83.49,87.95 | v98.41,28.89 99.36,29.84 99.36,81.92
OUT-ON  (via drill 0.33)  (2 unrouted)
  Top 0.152: IC3.11 78.09,70.8 100.95,70.8 v101.27,71.12
  Bottom 0.152: IC12.8 102.86,107.63 105.4,107.63 105.4,98.74 104.13,97.47 102.22,97.47 102.22,87 103.81,85.41 103.81,83.82 | v101.27,71.12 100.95,71.44 100.95,80.96
READY  (1 unrouted)
  Bottom 0.152: IC10.18 30.47,125.41 33.01,125.41 33.01,131.13 46.98,145.1 | READY.A 46.98,145.1 | 46.98,145.1 46.98,87.31
READY1  (via drill 0.33)
  Top 0.152: IC10.24 16.5,124.14 v44.76,124.14
  Bottom 0.152: v44.76,124.14 46.34,122.56 46.34,85.41
REG-BRD-LD-ID0  (via drill 0.33)
  Top 0.152: v28.88,35.56 IC8.12 | IC14.2 59.68,95.57 39.04,95.57 v32.05,88.58
  Bottom 0.152: v28.88,35.56 SV1.21 30.15,83.82 30.15,86.68 v32.05,88.58
REG-BRD-LD-ID1  (via drill 0.33)
  Top 0.152: IC8.13 26.98,36.2 v29.52,36.2 | IC14.3 59.68,100.01 34.59,100.01 v33.01,98.42
  Bottom 0.152: v29.52,36.2 31.42,38.1 SV1.23 32.69,83.82 32.69,98.11 v33.01,98.42
REG-BRD-RD-ID0  (via drill 0.33)
  Top 0.152: v47.3,75.25 43.48,71.44 23.48,71.44 22.53,72.39 IC5.17
  Bottom 0.152: IC5.17 18.72,72.39 SV1.13 | IC14.26 50.79,96.84 50.79,85.72 50.47,85.41 50.47,81.92 47.3,78.74 v47.3,75.25
REG-BRD-RD-ID1
  Top 0.152: IC14.27 52.38,95.89 25.07,95.89 17.45,88.27 13.32,88.27 13.01,87.95 13.01,86.36 19.04,86.36 19.99,85.41 19.99,82.55 SV1.15
  Bottom 0.152: IC5.18 21.26,69.85 SV1.15
REG-FUNC  (via drill 0.33)
  Top 0.152: IC5.11 25.39,70.8 10.78,70.8 6.02,75.56 SV1.3 | IC14.21 52.38,111.12 v14.28,111.12
  Bottom 0.152: v14.28,111.12 9.2,106.05 9.2,87.31 7.29,85.41 7.29,83.82 SV1.3
REG-LD-HI  (via drill 0.33)
  Top 0.152: v62.54,90.17 56.19,83.82 47.93,83.82 SV1.35
  Bottom 0.152: IC7.11 46.66,35.56 SV1.35 | IC13.21 62.54,108.58 v62.54,90.17
REG-LD-ID0  (via drill 0.33)
  Top 0.152: IC8.15 13.96,40.96 v33.01,40.96 | IC14.4 59.68,102.55 44.12,102.55 v42.53,100.97 | v40.31,86.36 36.18,86.36 35.23,85.41 35.23,82.55 SV1.25
  Bottom 0.152: v33.01,40.96 33.96,41.91 SV1.25 | v42.53,100.97 40.31,98.74 v40.31,86.36
REG-LD-ID1  (via drill 0.33)
  Top 0.152: IC8.16 15.54,40.01 v33.01,40.01 | v59.36,81.92 58.73,81.28 37.77,81.28 SV1.27
  Bottom 0.152: v33.01,40.01 34.59,41.59 34.59,80.64 SV1.27 | IC14.5 59.04,102.55 59.04,82.23 v59.36,81.92
REG-LD-LO  (via drill 0.33)
  Top 0.152: IC8.18 12.69,32.07 33.64,32.07 36.18,34.61 37.45,34.61 38.41,35.56 v39.99,35.56 | IC14.7 59.68,110.17 47.3,110.17 v45.39,108.27
  Bottom 0.152: v39.99,35.56 41.58,37.15 SV1.31 41.58,83.19 42.85,84.45 42.85,85.41 43.8,86.36 43.8,88.27 45.07,89.53 45.07,107.95 v45.39,108.27
REG-RD-HI  (via drill 0.33)
  Top 0.152: IC8.19 14.59,31.43 v39.99,31.43 | IC14.8 59.36,110.49 v45.71,110.49
  Bottom 0.152: v39.99,31.43 44.44,35.88 44.44,82.23 SV1.33 45.39,83.82 45.39,85.41 46.02,86.04 46.02,110.17 v45.71,110.49
REG-RD-ID0  (via drill 0.33)
  Top 0.152: v53.33,79.69 52.38,78.74 27.61,78.74 SV1.17
  Bottom 0.152: IC5.19 23.8,67.31 SV1.17 | IC14.28 53.33,93.66 v53.33,79.69
REG-RD-ID1
  Top 0.152: IC14.1 60,93.34 54.91,93.34 52.06,90.49 52.06,87.31 29.52,87.31 27.61,85.41 27.61,82.55 SV1.19
  Bottom 0.152: IC8.11 24.75,32.07 24.75,80.96 SV1.19
REG-RD-LO  (via drill 0.33)
  Top 0.152: IC8.17 14.91,36.83 v37.14,36.83 | v50.15,86.36 41.26,86.36 40.31,85.41 40.31,82.55 SV1.29
  Bottom 0.152: v37.14,36.83 39.04,38.73 SV1.29 | IC14.6 59.36,107.95 50.15,107.95 v50.15,86.36
RESET  (via drill 0.33)  (2 unrouted)
  Top 0.152: v82.86,88.58 83.17,88.9 100.32,88.9 103.81,85.41 103.81,81.28 98.73,81.28
  Bottom 0.152: IC2.18 92.7,30.48 92.7,64.14 97.46,68.9 | IC11.22 82.86,104.78 v82.86,88.58
SCL
  Top 0.152: IC9.6 14.28,103.5 4.12,103.5 2.53,105.09 2.53,109.22 R5.1 | 61.58,122.87 IC14.12 | 72.38,122.87 61.58,122.87 | IC13.12 72.38,122.87 | 85.08,122.87 IC11.12 | 72.38,122.87 85.08,122.87 | 97.78,122.87 IC12.12 | 85.08,122.87 97.78,122.87 | IC1-5.12 110.48,122.87 97.78,122.87 | IC10.28 7.61,122.87 61.58,122.87
  Bottom 0.152: R5.1 2.53,110.17 2.53,126.05 IC10.28
SDA
  Top 0.152: R12.1 5.07,103.82 16.5,103.82 IC9.5 | 61.58,123.51 IC14.13 | 72.38,123.51 61.58,123.51 | IC13.13 72.38,123.51 | 85.08,123.51 IC11.13 | 72.38,123.51 85.08,123.51 | 97.78,123.51 IC12.13 | 85.08,123.51 97.78,123.51 | IC1-5.13 110.48,123.51 97.78,123.51 | IC10.27 9.51,123.51 61.58,123.51
  Bottom 0.152: IC10.27 4.43,125.41 4.43,106.36 R12.1
SP/PC-ADDR-RD  (via drill 0.33)
  Top 0.152: v35.23,79.38 34.28,80.33 26.98,80.33 25.07,82.23 25.07,85.09 SV1.18 | IC13.8 72.38,112.71 v27.93,112.71
  Bottom 0.152: IC6.19 34.91,68.9 34.91,79.06 v35.23,79.38 | v27.93,112.71 23.8,108.58 SV1.18
SP/PC-DATA-RD-HI  (via drill 0.33)
  Top 0.152: IC6.18 35.23,71.12 22.85,71.12 v22.53,71.44 | IC13.7 72.06,107.95 47.3,107.95 46.34,107 23.48,107 v23.17,107.31
  Bottom 0.152: v22.53,71.44 22.53,83.82 SV1.16 21.26,105.41 v23.17,107.31
SP/PC-DATA-RD-LO  (via drill 0.33)
  Top 0.152: IC6.17 35.23,73.66 v18.09,73.66 | IC13.6 72.38,105.73 45.07,105.73 44.12,106.68 v21.26,106.68
  Bottom 0.152: v18.09,73.66 17.45,74.3 17.45,83.82 SV1.14 20.94,87.31 20.94,106.36 v21.26,106.68
SP/PC-DN  (via drill 0.33)
  Top 0.152: v55.23,84.45 52.69,87 33.33,87 SV1.24 | IC12.23 90.16,107.63 59.68,107.63 v58.41,106.36
  Bottom 0.152: IC4.17 55.23,39.69 55.23,73.98 | v55.23,84.45 55.23,73.98 | v58.41,106.36 58.41,77.15 55.23,73.98
SP/PC-LD-HI  (via drill 0.33)
  Top 0.152: IC12.22 90.16,110.17 63.49,110.17 61.58,108.27 46.98,108.27 46.02,107.31 31.74,107.31 v31.42,107.63
  Bottom 0.152: IC4.18 52.69,21.27 38.09,21.27 38.09,20 37.45,19.37 28.25,19.37 28.25,81.6 27.61,82.23 27.61,83.82 SV1.22 28.88,105.09 v31.42,107.63
SP/PC-LD-LO  (via drill 0.33)
  Top 0.152: IC4.19 60.95,26.99 v24.75,26.99 | IC12.21 89.52,113.35 v29.52,113.35
  Bottom 0.152: v24.75,26.99 24.44,27.3 24.44,81.6 25.07,82.23 25.07,83.82 SV1.20 26.34,110.17 v29.52,113.35
SP/PC-SEL  (via drill 0.33)
  Top 0.152: IC6.16 35.55,73.98 18.72,73.98 18.4,74.3 v15.54,74.3 | IC13.5 72.38,103.19 v20.31,103.19
  Bottom 0.152: v15.54,74.3 15.23,74.61 15.23,81.92 14.91,82.23 14.91,83.82 SV1.12 18.4,87.31 18.4,101.28 v20.31,103.19
SP/PC-UP  (via drill 0.33)
  Top 0.152: 58.09,105.09 v57.77,104.78 | 58.09,105.09 89.84,105.09 90.79,104.14 IC12.24 | v34.59,103.82 50.79,103.82 52.06,105.09 58.09,105.09
  Bottom 0.152: IC4.16 58.73,38.73 58.73,105.73 59.04,106.05 59.04,106.68 58.73,107 57.77,107 v57.77,104.78 | SV1.26 34.59,85.72 v34.59,103.82
SR-LD  (via drill 0.33)  (1 unrouted)
  Top 0.152: IC3.15 63.81,79.38 v86.35,79.38 | IC12.5 97.46,102.87 v87.94,102.87
  Bottom 0.152: v86.35,79.38 88.57,81.6 88.57,83.19 87.62,84.14 | 87.3,84.45 87.62,84.14 | v87.94,102.87 87.62,102.55 87.62,84.14
UCODE-COUNT-RESET  (via drill 0.33)  (2 unrouted)
  Top 0.152: IC2.12 100.95,34.61 v85.08,34.61 | v84.12,95.57 79.36,95.57
  Bottom 0.152: v85.08,34.61 83.49,36.2 83.49,83.82 84.44,84.77 84.44,95.25 v84.12,95.57
VCC  (2 unrouted)
  Top 0.152: C18.2 43.8,40.96 67.3,40.96 C19.2 69.2,40.96 94.6,40.96 | IC5.28 13.64,41.91 C23.2 18.4,42.86 34.91,42.86 35.55,43.5 | 35.55,43.5 IC6.28 | 60.95,43.5 IC3.28 | 35.55,43.5 60.95,43.5 | 86.35,43.5 IC1.28 | 60.95,43.5 86.35,43.5 | 94.6,40.96 C17.2 | 94.6,40.96 96.83,40.96 97.14,41.27 97.14,43.5 86.35,43.5 | IC8.28 13.64,2.54 C21.2 19.04,4.13 37.45,4.13 | C16.2 89.84,2.54 IC2.28 85.71,3.49 69.2,3.49 C22.2 64.44,2.54 62.85,4.13 | 37.45,4.13 39.04,2.54 C20.2 44.44,4.13 62.85,4.13 | 37.45,4.13 IC7.28 | 62.85,4.13 IC4.28 | R25.2 43.17,106.36 21.9,106.36 20.94,105.41 C15.2 | IC9.1 IC9.2 IC9.3 | IC9.8 11.1,99.06 JP4.3 3.48,99.06 SV1.2 | R12.2 R5.2 7.29,109.22 R8.1 0.62,113.03 0.62,133.03 S-A.1 | IC12.15 IC12.16 | IC13.16 64.12,126.05 53.96,126.05 IC14.15 46.02,127 44.44,128.59 25.39,128.59 IC10.20 | IC14.9 61.58,115.25 72.38,115.25 IC13.9 | 97.78,115.25 IC12.9 | 97.78,115.25 86.98,115.25 IC11.9 | 97.78,115.25 110.48,115.25 IC1-5.9 113.34,114.3 113.34,86.36 111.43,86.36
  Bottom 0.152: R3.2 9.51,21.91 9.51,6.67 IC8.28 | C16.2 C17.2 | IC10.7 19.04,119.06 19.04,110.49 | 19.04,110.49 19.04,106.36 19.67,105.73 | IC10.20 22.53,125.73 22.53,113.98 19.04,110.49 | SV1.2 SV1.1 3.48,66.36 11.42,66.36 12.69,65.09 12.69,46.67 C23.2 | IC9.1 IC9.8 13.64,101.6 13.64,104.14 | R12.2 13.64,104.14 | 19.67,105.73 18.09,104.14 13.64,104.14 | 19.67,105.73 C15.2 | 91.11,132.08 R1.2 | IC12.15 91.11,132.08 | FTDI-VCC.1 91.11,133.35 91.11,132.08 | IC11.9 80,120.33 | 80,120.33 78.73,121.6 | IC13.9 76.82,117.79 76.82,119.7 78.73,121.6 | 78.73,121.6 IC11.17 | IC14.15 59.04,120.97 59.04,115.89 IC14.9 | IC12.16 86.98,120.33 80,120.33

## Text on the board
tNames: WP | YACC1 SEQUENCER MEMORY BOARD V1.0 | www.onepagecomputer.com